# Altium PCB PCB_Songram-M071_2_2024-09-20.pcbdoc
Units mil, origin at the board's own origin, x right, y up, seen from the top; angles counter-clockwise.
Board outline 5724.4 x 5724.4 mil, 2 copper layers (Top Layer, Bottom Layer); 9 components, 38 nets, 63 pads, 3 vias.
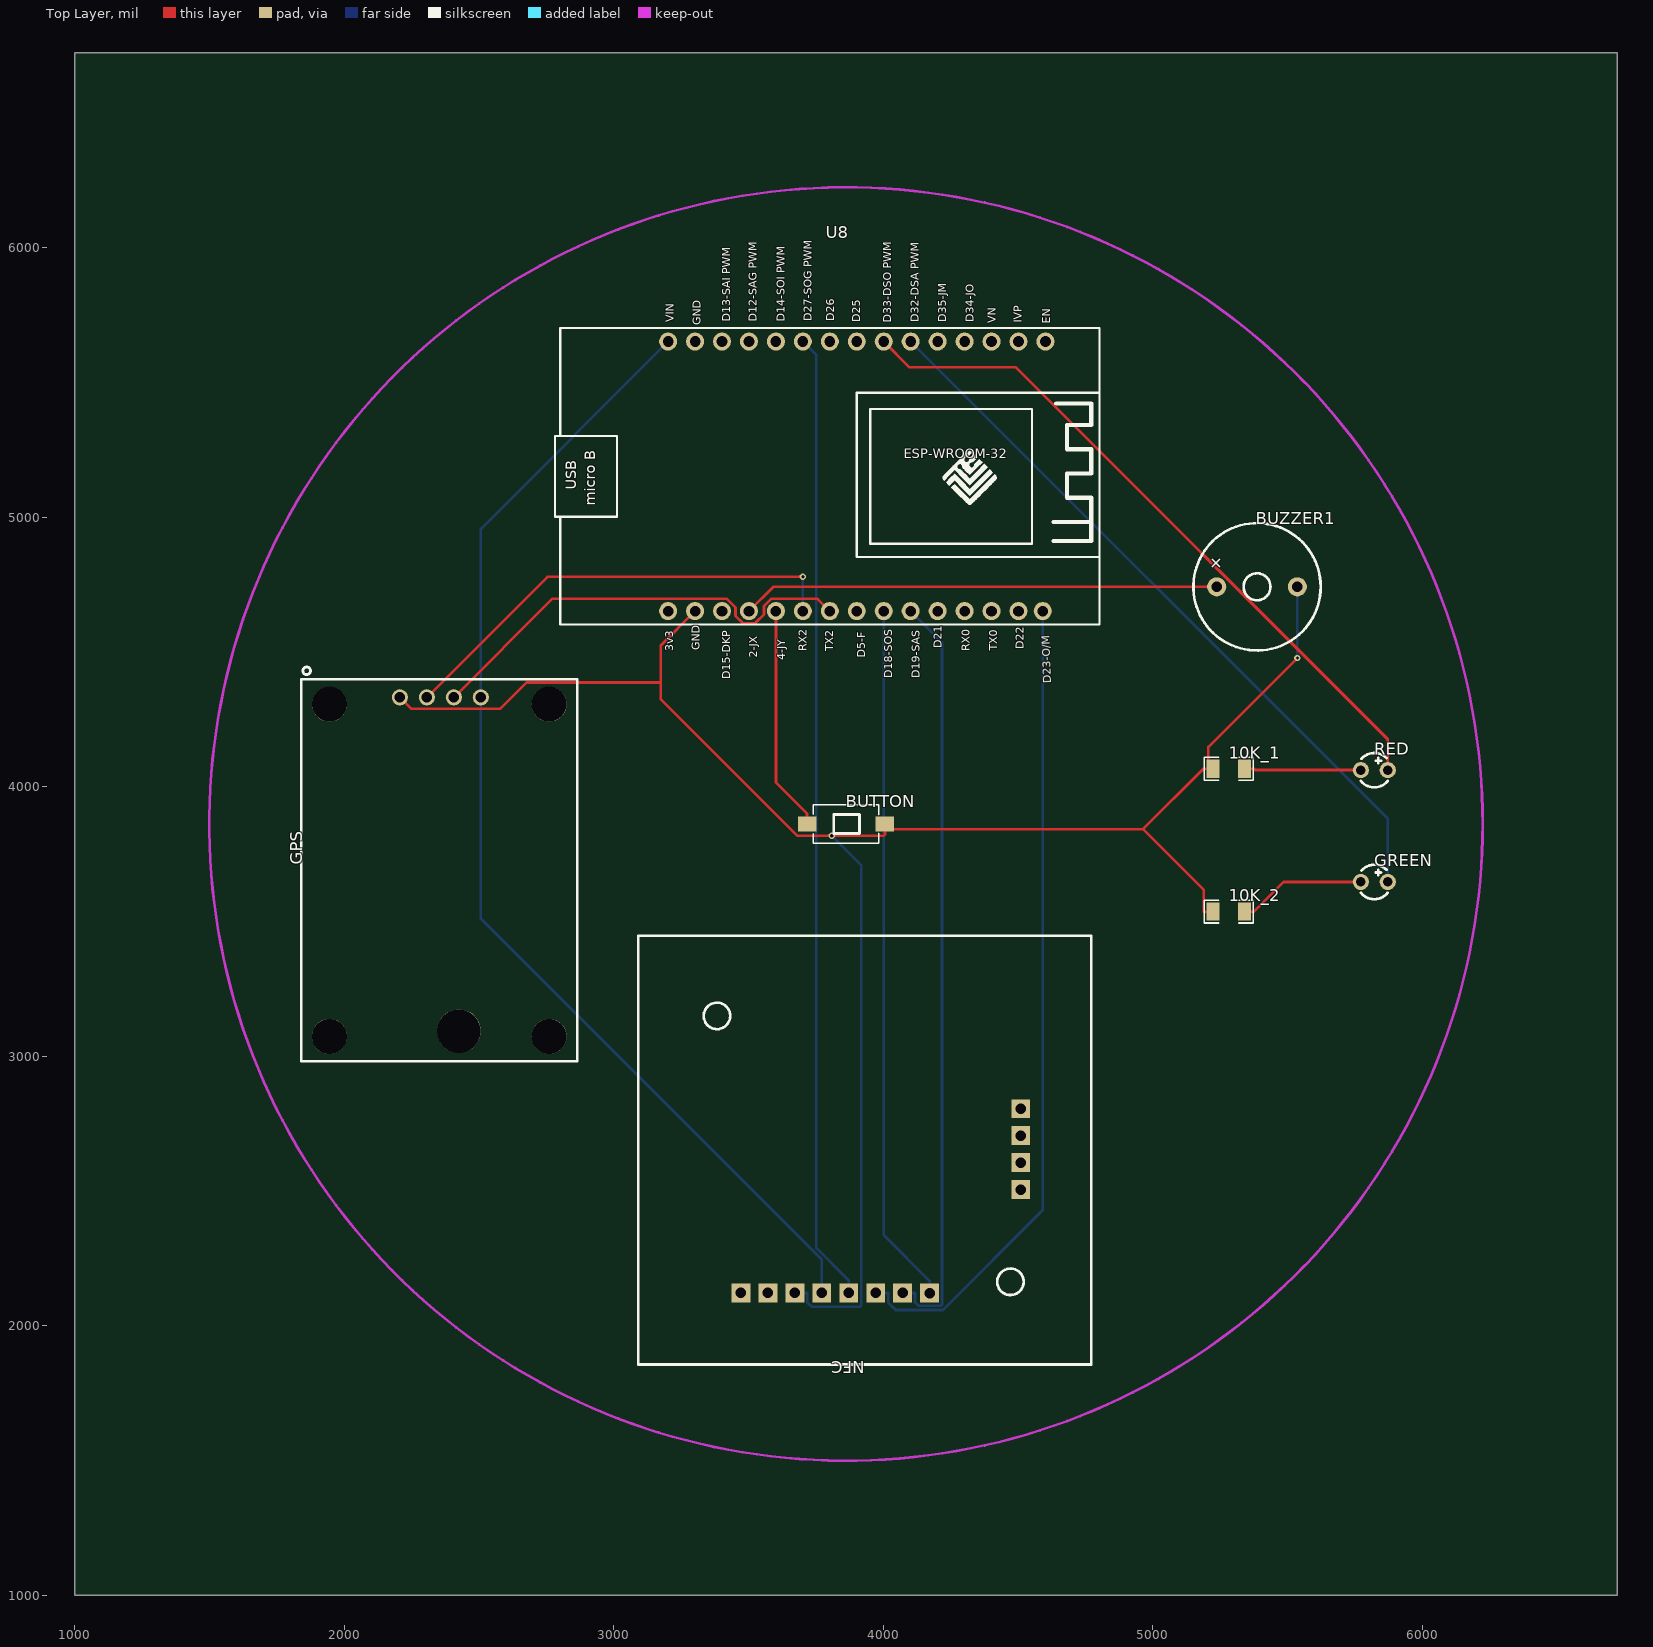
[diagram p0: Top Layer view]
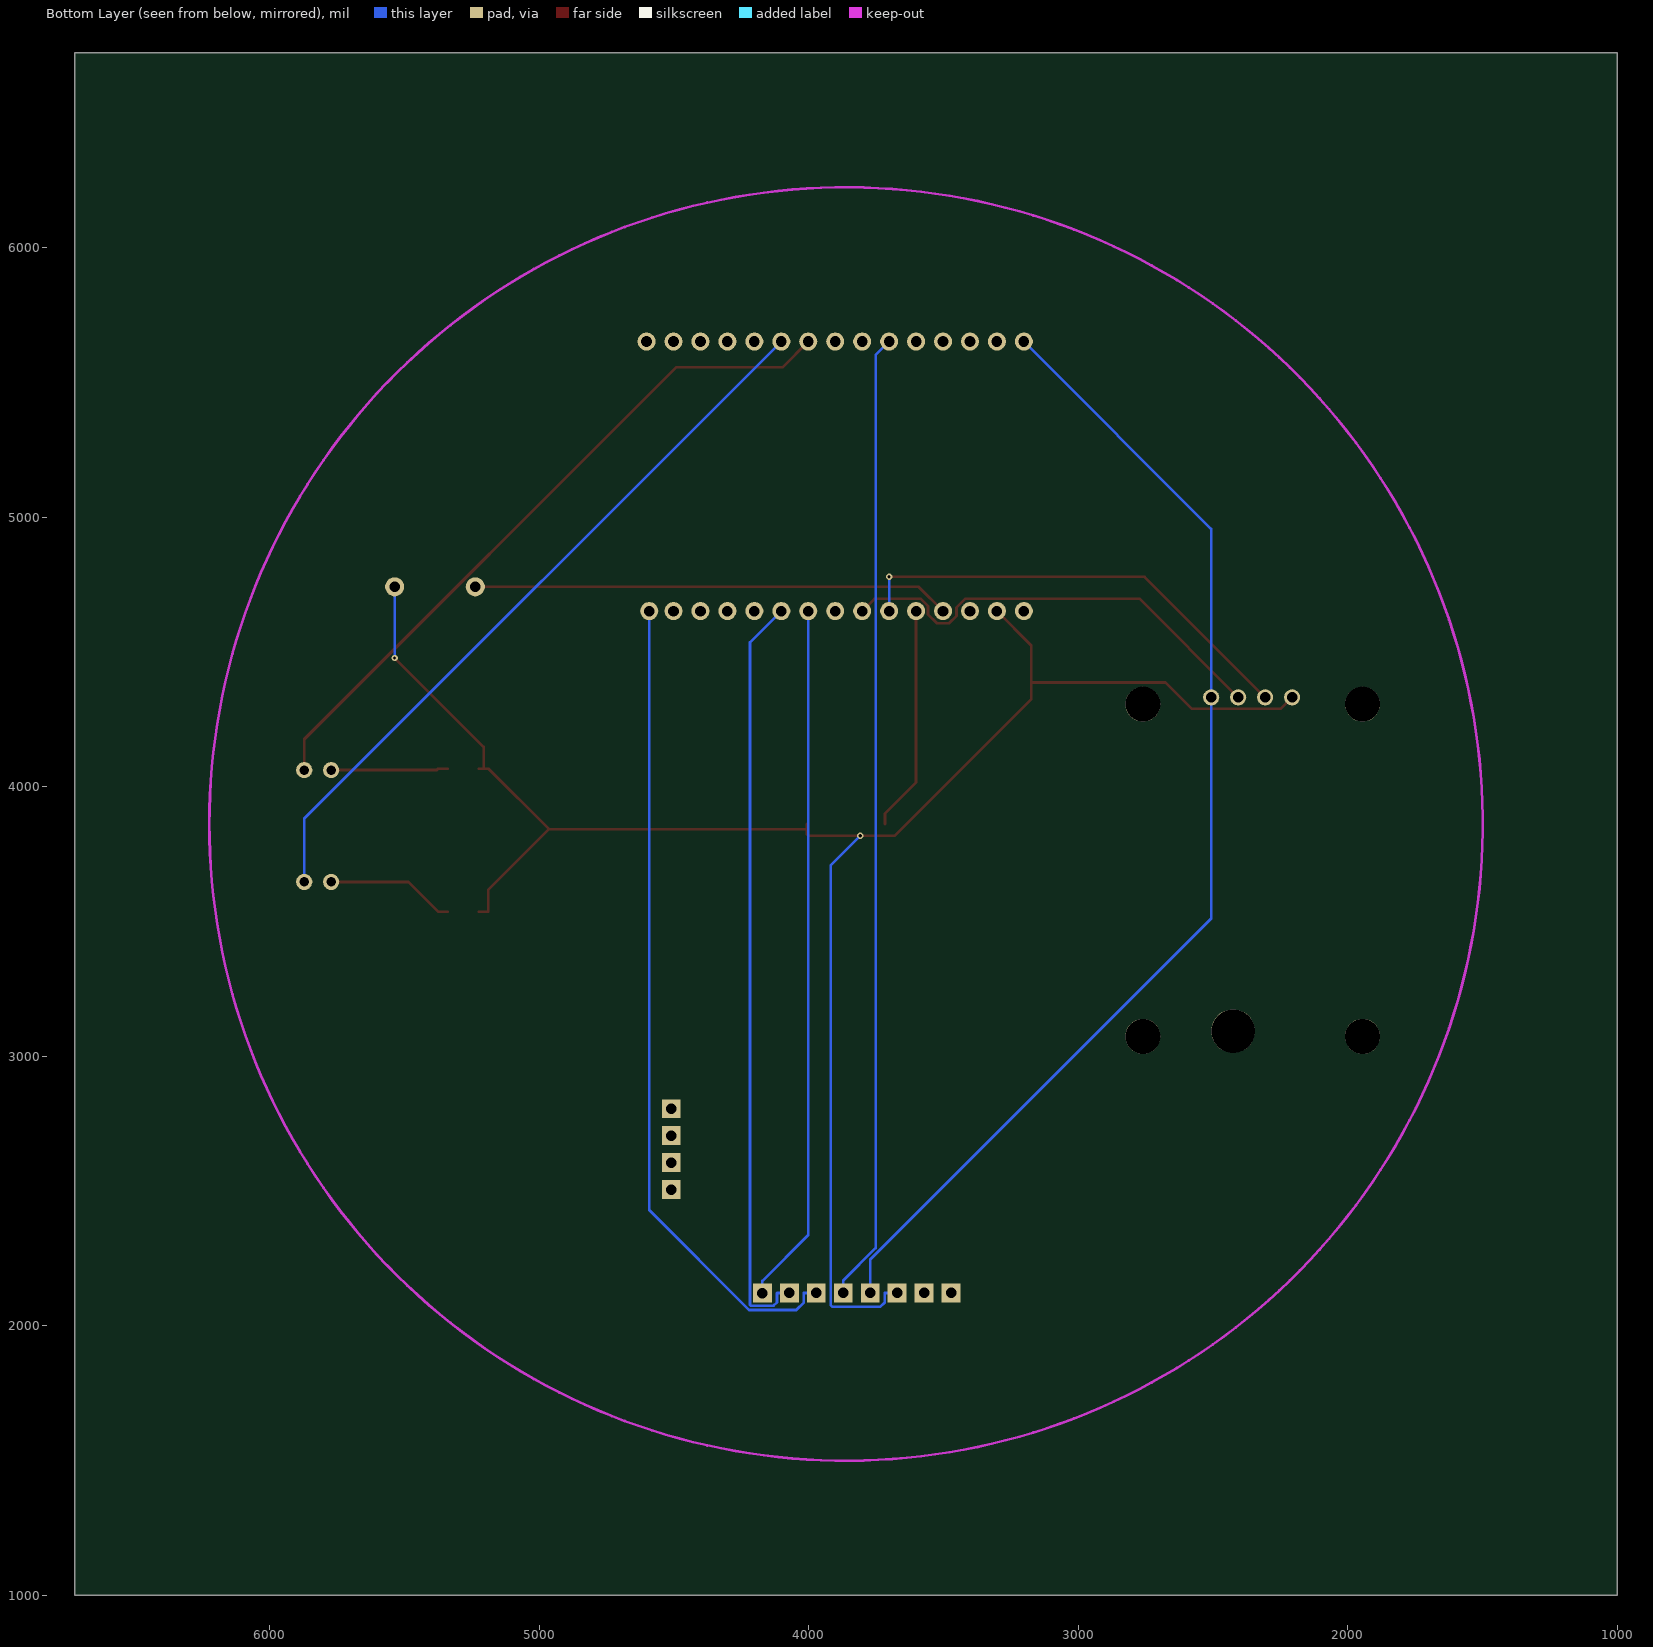
[diagram p1: Bottom Layer view, seen from below]

## Layer stack, top to bottom
Top Layer: signal copper (thickness not stored)
Dielectric: dielectric 12.6, FR-4, Dk 4.8
Bottom Layer: signal copper (thickness not stored)

## Board outline
6724.4,1000 1000,1000 1000,6724.4 6724.4,6724.4

## Components (designator, comment, footprint, x,y, rotation, side; value= is the part's Value field where it differs from the comment)
10K_1 "10kΩ" R1206 5282.2,4067.2 r0 top
10K_2 "10kΩ" R1206 5282.2,3537.2 r0 top
BUTTON "BUTTON2" SW-SMD_L6.0-W3.5-LS8.0-1 3862.2,3862.2 r0 top
BUZZER1 "BUZZER-12X9" BUZ-TH_BD12.0-P7.60-D0.6-FD 5387.2,4742.2 r0 top
GPS "ATK-NEO-6M" TH_ATK-NEO-6M 2357.2,4332.2 r90 top
GREEN "Green" LED-TH_BD3.0-P2.54-RD-RED 5822.2,3647.2 r0 top
NFC "PN532 NFC RFID module V3" "PN532 NFC RFID MODULE V3" 4772.2,1857.2 r180 top
RED "RED" LED-TH_BD3.0-P2.54-RD-RED 5822.2,4062.2 r0 top
U8 "esp-32-devkit" ESP-32-DEVKIT 3867.2,5107.2 r0 top

## Footprints (in the part's own frame and the unit in brackets; to place one, negate y for a bottom-side part, rotate by r counter-clockwise, add the part's x,y. Pads: shape width x height; smd on the part's side, far side on the other; paste and mask are expansions set on the pad)
BUZ-TH_BD12.0-P7.60-D0.6-FD [mm]
  round 1.8 hole 1 paste+0 mask+0.051: 1(-3.8,0) 2(3.8,0)
  silkscreen extent -6,-6 6,6
ESP-32-DEVKIT [mm]
  round 1.7 hole 1 paste+0 mask+0.102: 1(-16.891,-11.557) 2(-14.351,-11.557) 3(-11.811,-11.557) 4(-9.271,-11.557) 5(-6.731,-11.557) 6(-4.191,-11.557) 7(-1.651,-11.557) 8(0.889,-11.557) 9(3.429,-11.557) 10(5.969,-11.557) 11(8.509,-11.557) 12(11.049,-11.557) 13(13.589,-11.557) 14(16.129,-11.557) 15(18.415,-11.557) 16(18.669,13.843) 17(16.129,13.843) 18(13.589,13.843) 19(11.049,13.843) 20(8.509,13.843) 21(5.969,13.843) 22(3.429,13.843) 23(0.889,13.843) 24(-1.651,13.843) 25(-4.191,13.843) 26(-6.731,13.843) 27(-9.271,13.843) 28(-11.811,13.843) 29(-14.351,13.843) 30(-16.891,13.843)
  silkscreen extent -27.56,-12.83 23.75,15.11
LED-TH_BD3.0-P2.54-RD-RED [mil]
  round 60 hole 35.43 paste+0 mask+2: 1(-50,0) 2(50,0)
  silkscreen extent -50,-64 50,64
"PN532 NFC RFID MODULE V3" [mil]
  rect 70x70 hole 39 paste+0 mask+2: 1(261.65,-948.66) 2(261.65,-848.66) 3(261.65,-748.66) 4(261.65,-648.66) 5(599.8,-264.29) 6(699.8,-265) 7(799.8,-265) 8(899.8,-265) 9(999.8,-265) 10(1099.8,-265) 11(1199.8,-265) 12(1299.8,-265)
  silkscreen extent 0,-1591 1681,0
R1206 [mil]
  rect 47.54x66.97 smd paste-3937.01 mask+2: 1(-58.22,0) 2(58.22,0)
  silkscreen extent -91,-42 91,42
SW-SMD_L6.0-W3.5-LS8.0-1 [mm]
  rect 1.74x1.4 smd paste+0 mask+0.051: 1(-3.67,0) 2(3.67,0)
  silkscreen extent -3.08,-1.83 3.08,1.83
TH_ATK-NEO-6M [mm]
  round 1.524 hole 1 paste+0 mask+0.05: 1(0,3.81) 2(0,1.27) 3(0,-1.27) 4(0,-3.81)
  round 3.3 hole 3.3 unplated paste+0: ""(-31.95,-10.25) ""(-31.95,10.45) ""(-0.65,10.45) ""(-0.65,-10.25)
  round 4.1 hole 4.1 unplated paste+0: ""(-31.45,-1.75)
  silkscreen extent -34.3,-12.9 2.86,13.1

## Via types
v1: diameter 24, hole 12, Top Layer to Bottom Layer, tented both sides, 3 vias

## Nets (pads, with @x,y where several pads share a name; then routed paths per layer and width w, separated by ;. In a path a pad name is that pad's centre, name@x,y a point inside that pad or via, vN(x,y) a via of type N, cw(c..) or ccw(c..) an arc to the next point about the centre after c; other vN are vias at no path point)
BUTTON_+: BUTTON.1 U8.5 | length 837.9
  Top Layer w10: U8.5 3602.21,4016.27 3717.71,3900.77 BUTTON.1
BUZZER_+: BUZZER1.1 U8.4 | length 1772.7
  Top Layer w10: U8.4 3592.2,4742.2 BUZZER1.1
GND: 10K_1.1 10K_2.1 BUTTON.2 BUZZER1.2 GPS.1 NFC.10 U8.2 | length 7121.1
  Top Layer w10: GPS.1 2250.02,4289.38 2579.09,4289.38 2677.05,4387.34 3175.4,4387.34 ; U8.2 3175.4,4525.4 3175.4,4387.34 ; BUTTON.2 BUTTON.2@4006.69,3842.92 ; 10K_2.1 5189.2,3537.2 5189.2,3618.64 4964.92,3842.92 ; 10K_1.1 10K_1.1@5206.59,4067.2 ; v1(5536.81,4478.13) 5206.59,4147.91 10K_1.1@5206.59,4067.2 ; 3175.4,4387.34 3175.4,4324.59 3681.5,3818.49 v1(3809.71,3818.49) 4001.55,3818.49 4006.69,3823.63 BUTTON.2@4006.69,3842.92 ; BUTTON.2@4006.69,3842.92 4964.92,3842.92 ; 4964.92,3842.92 5189.2,4067.2 10K_1.1@5206.59,4067.2
  Bottom Layer w10: NFC.10 3718.41,2122.2 3718.41,2087.69 3735.33,2070.77 3912.5,2070.77 3919.2,2077.47 3919.2,3709 v1(3809.71,3818.49) ; v1(5536.81,4478.13) BUZZER1.2
GPS_RX: GPS.3 U8.7 | length 1677.3
  Top Layer w10: GPS.3 2773.38,4698.38 3419.17,4698.38 3452.23,4665.32 3452.23,4634.09 3479.11,4607.21 3525.52,4607.21 3557.7,4639.39 3557.7,4670.64 3584.61,4697.55 3756.87,4697.55 U8.7
GPS_TX: GPS.2 U8.6 | length 1707.1
  Top Layer w10: GPS.2 2754.14,4779.14 v1(3702.21,4779.14)
  Bottom Layer w10: U8.6 v1(3702.21,4779.14)
GREEN_LED_+: GREEN.2 U8.21 | length 2738.2
  Bottom Layer w10: U8.21 5872.2,3882.22 GREEN.2
NFC_MOSI: NFC.7 U8.15 | length 3042.2
  Bottom Layer w10: NFC.7 4018.41,2122.2 4018.41,2087.69 4046.81,2059.29 4222.1,2059.29 4592.21,2429.4 U8.15
NFC_MSO: NFC.6 U8.10 | length 2808.9
  Bottom Layer w10: NFC.6 4118.41,2122.2 4118.41,2087.69 4130.67,2075.43 4215.55,2075.43 4218.46,2078.34 4218.46,4535.96 U8.10
NFC_SCK: NFC.5 U8.9 | length 2601.2
  Bottom Layer w10: U8.9 4002.21,2337.69 4172.4,2167.5 NFC.5
NFC_SS: NFC.8 U8.25 | length 3600.5
  Bottom Layer w10: U8.25 3752.21,5602.21 3752.21,2288.4 3872.4,2168.21 NFC.8
POWER: GPS.4 NFC.9 U8.30 | length 4342
  Bottom Layer w10: U8.30 2507.2,4957.2 GPS.4 2507.2,3510.7 3772.4,2245.5 NFC.9
RED_LED_+: RED.2 U8.22 | length 2595.6
  Top Layer w10: U8.22 4097.91,5556.51 4492.23,5556.51 5872.2,4176.54 RED.2
U1_1: NFC.1
U1_2: NFC.2
U1_3: NFC.3
U1_4: NFC.4
U1_11: NFC.11
U1_12: NFC.12
U2_1: 10K_1.2 RED.1 | length 433.9
  Top Layer w10: 10K_1.2 5375.2,4067.2 5380.2,4062.2 RED.1
U3_1: 10K_2.2 GREEN.1 | length 477.3
  Top Layer w10: 10K_2.2 5375.2,3537.2 5485.2,3647.2 GREEN.1
U8_1: U8.1
U8_3: U8.3
U8_8: U8.8
U8_11: U8.11
U8_12: U8.12
U8_13: U8.13
U8_14: U8.14
U8_16: U8.16
U8_17: U8.17
U8_18: U8.18
U8_19: U8.19
U8_20: U8.20
U8_23: U8.23
U8_24: U8.24
U8_26: U8.26
U8_27: U8.27
U8_28: U8.28
U8_29: U8.29
pads on no net: GPS.

## Keep-outs
Keep-Out Layer:
  circle w10: c3862.2,3862.2 r2362.2

## Text inside footprints (layer, text, board x,y; h text height)
BUZZER1: Top Overlay "+" at 5229.88,4794.02 h50 r45
U8: Top Overlay "VIN" at 3222.71,5724.25 h30 r90; Top Overlay "USB" at 2861.89,5102.21 h39.37 r90; Top Overlay "micro B" at 2931.89,5042.21 h39.37 r90; Top Overlay "ESP-WROOM-32" at 4075.82,5218.34 h35.43; Top Overlay "GND" at 3323.1,5712.44 h30 r90; Top Overlay "D13-SAI PWM" at 3433.34,5726.22 h30 r90; Top Overlay "D12-SAG PWM" at 3531.76,5726.22 h30 r90; Top Overlay "D14-SOI PWM" at 3634.13,5726.22 h30 r90; Top Overlay "D27-SOG PWM" at 3734.52,5728.19 h30 r90; Top Overlay "D26" at 3819.17,5728.19 h30 r90; Top Overlay "D25" at 3915.62,5724.25 h30 r90; Top Overlay "D33-DSO PWM" at 4029.79,5722.28 h30 r90; Top Overlay "D32-DSA PWM" at 4132.16,5724.25 h30 r90; Top Overlay "D35-JM" at 4234.52,5724.25 h30 r90; Top Overlay "D34-JO" at 4336.88,5724.25 h30 r90; Top Overlay "VN" at 4417.59,5720.31 h30 r90; Top Overlay "IVP" at 4514.05,5722.28 h30 r90; Top Overlay "RX0" at 4321.13,4503.78 h30 r90; Top Overlay "3v3" at 3220.74,4503.78 h30 r90; Top Overlay "GND" at 3319.17,4507.72 h30 r90; Top Overlay "D15-DKP" at 3433.34,4399.45 h30 r90; Top Overlay "2-JX" at 3533.73,4478.19 h30 r90; Top Overlay "4-JY" at 3636.09,4470.31 h30 r90; Top Overlay "RX2" at 3716.8,4503.78 h30 r90; Top Overlay "TX2" at 3815.23,4503.78 h30 r90; Top Overlay "D5-F" at 3933.34,4478.19 h30 r90; Top Overlay "D18-SOS" at 4033.73,4403.38 h30 r90; Top Overlay "D19-SAS" at 4136.09,4403.38 h30 r90; Top Overlay "D21" at 4217.2,4513.62 h30 r90; Top Overlay "TX0" at 4423.49,4505.75 h30 r90; Top Overlay "D22" at 4521.92,4509.68 h30 r90; Top Overlay "D23-O/M" at 4624.27,4384.22 h30 r92; Top Overlay "EN" at 4620.34,5718.34 h30 r90